# Altium PCB Charger600.PcbDoc
Units mm, origin at the board's own origin, x right, y up, seen from the top; angles counter-clockwise.
Board outline 93 x 50 mm, 4 copper layers (Top Layer, Signal Layer 1, Signal Layer 2, Bottom Layer), stack 0.778 mm thick; 86 components, 22 nets, 202 pads, 131 vias.
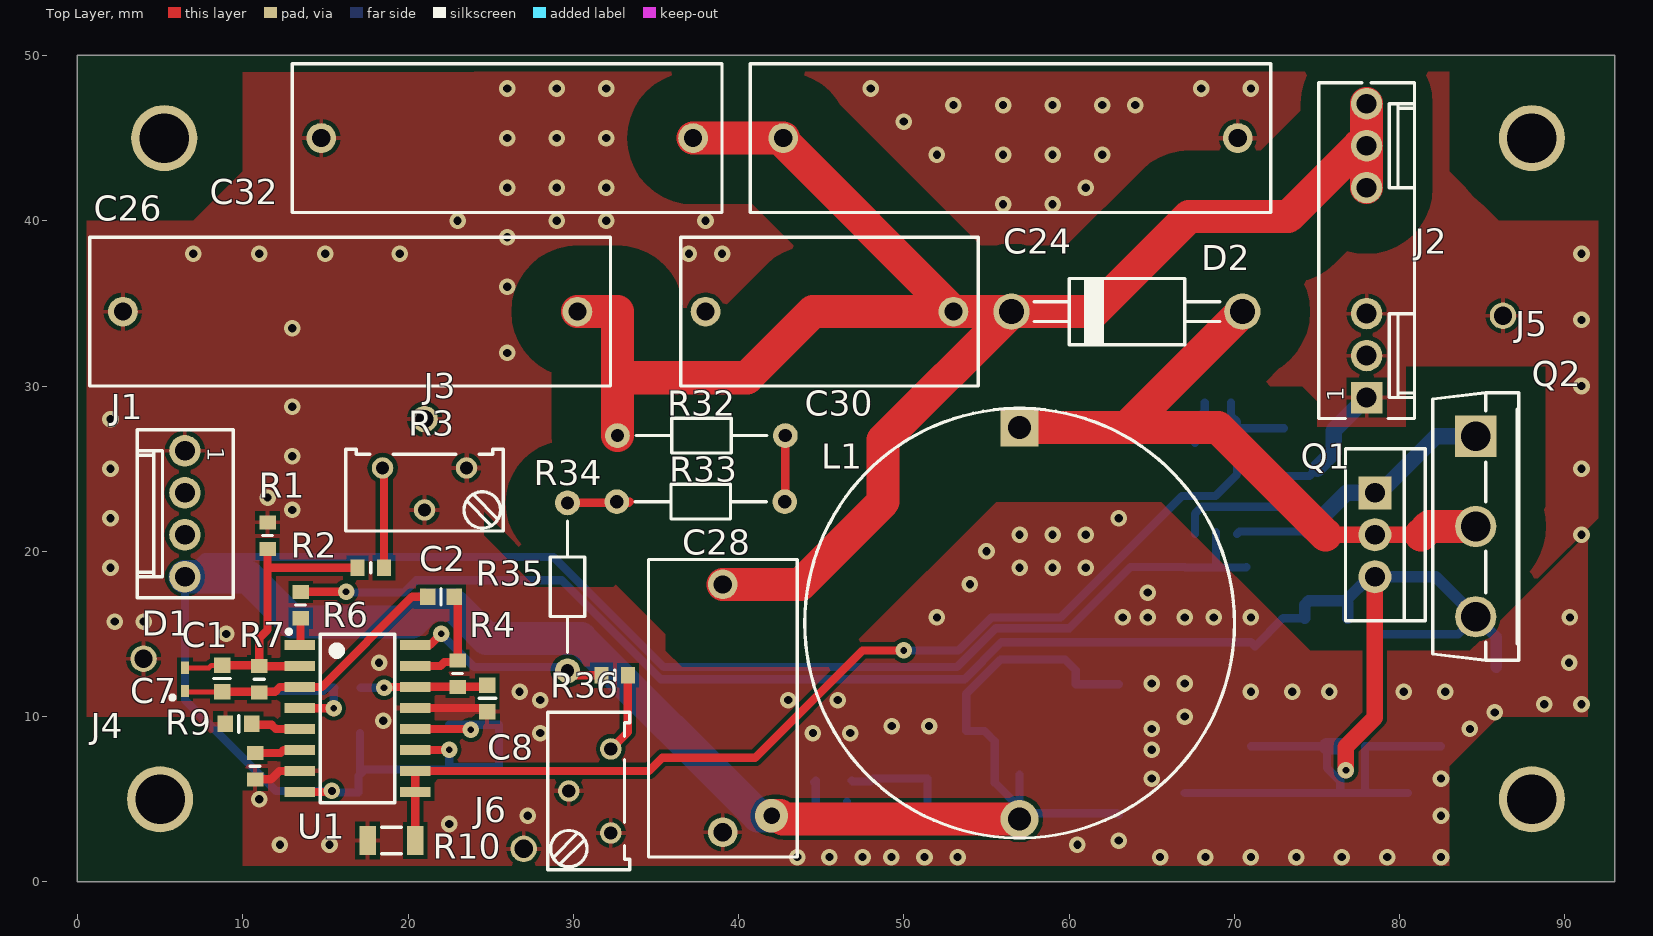
[diagram p0: Top Layer view]
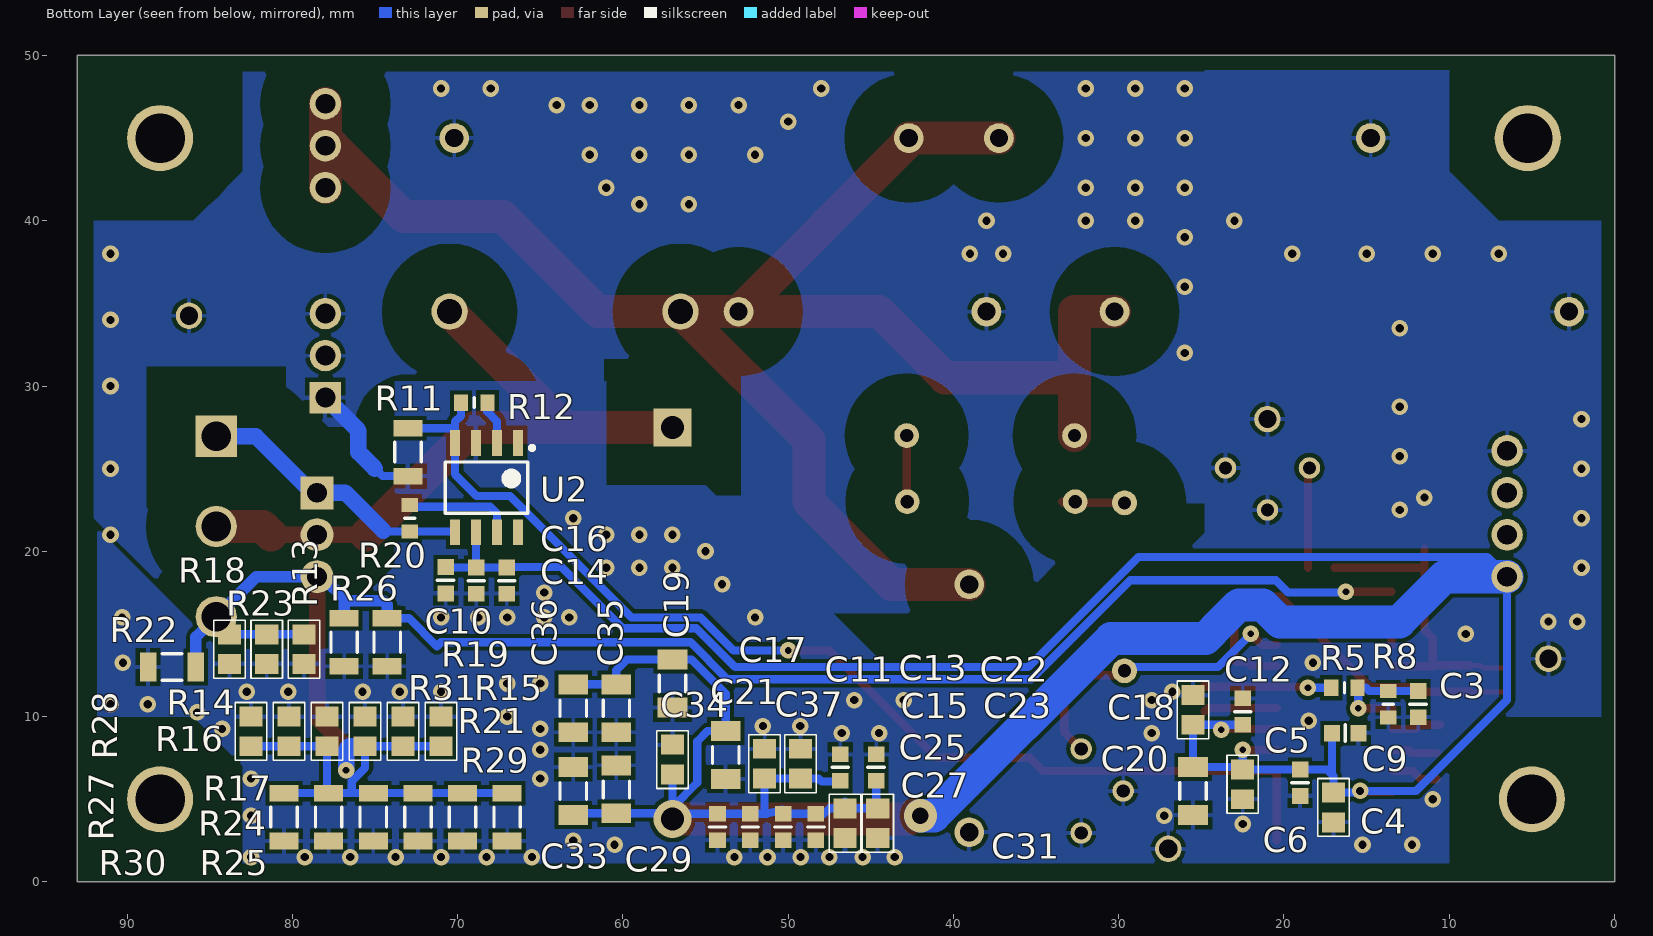
[diagram p1: Bottom Layer view, seen from below]
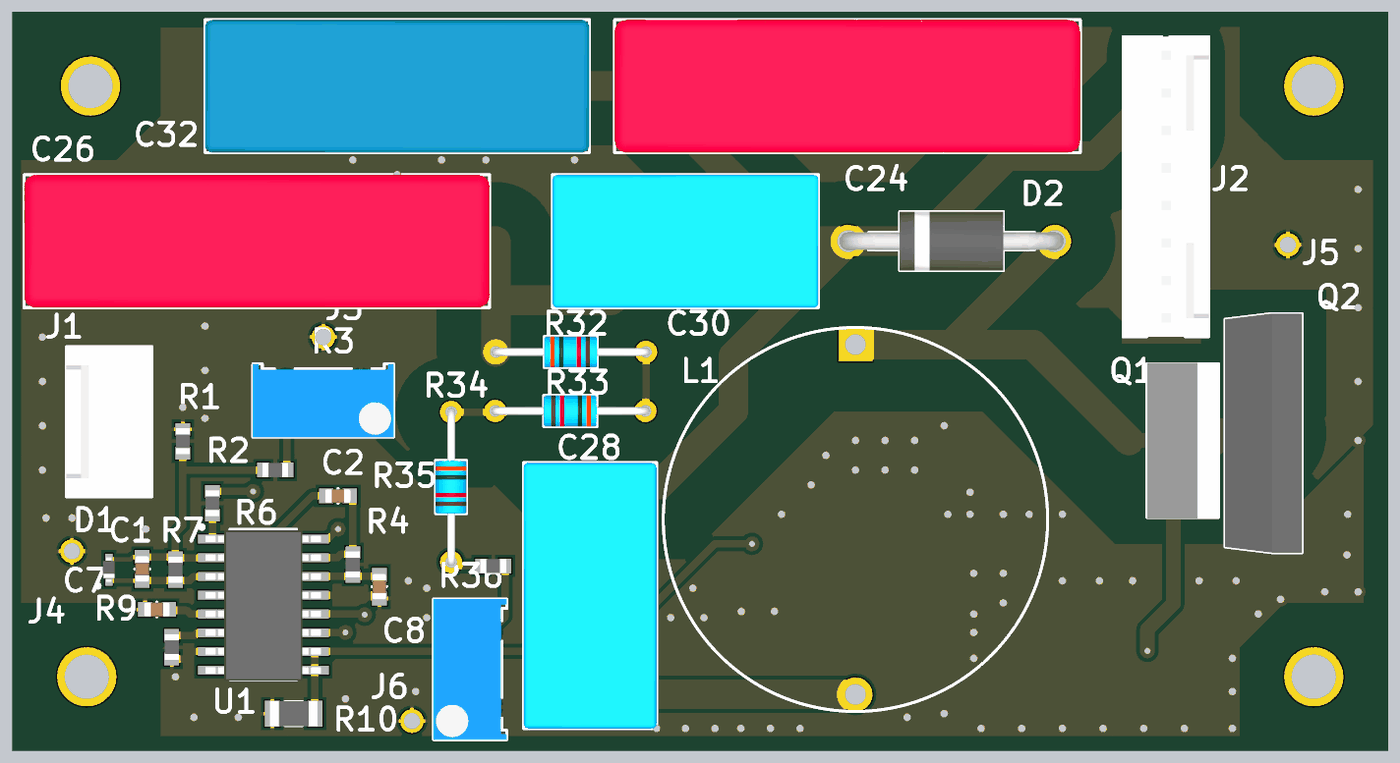
[diagram p2: 3D render of the assembled board from above, using the file's embedded part models]
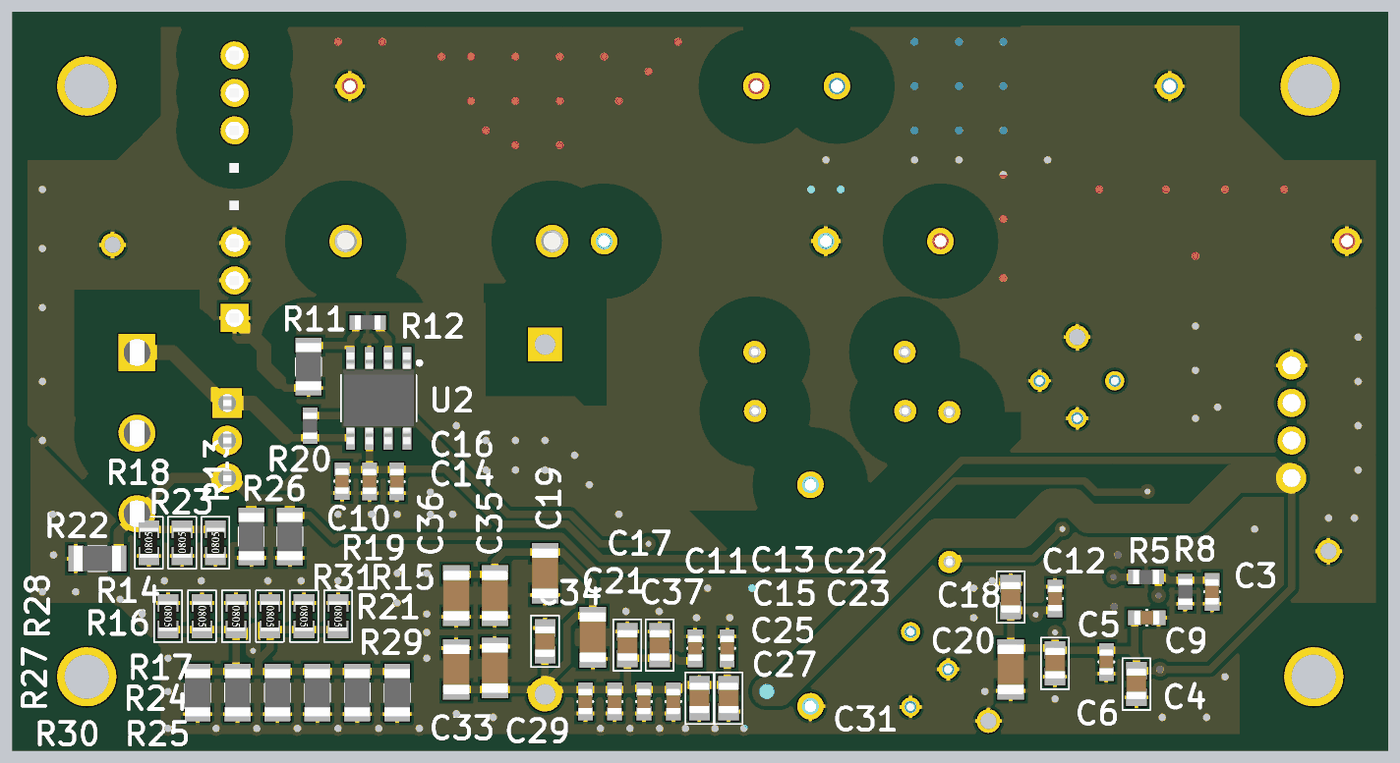
[diagram p3: 3D render of the assembled board from below, using the file's embedded part models]

## Layer stack, top to bottom
Top Solder: solder mask 0.0102, Solder Resist, Dk 3.5
Top Layer: signal copper 0.0356
Dielectric 1: core 0.254, FR-4, Dk 4.2
Signal Layer 1: signal copper 0.036
Dielectric 3: prepreg 0.127, Dk 4.2
Signal Layer 2: signal copper 0.036
Dielectric 2: core 0.254, Dk 4.2
Bottom Layer: signal copper 0.0356
Bottom Solder: solder mask 0.0102, Solder Resist, Dk 3.5

## Board outline
0,0 93,0 93,50 77.75,50 0,50

## Design rules (kind name [scope] priority, off if disabled: settings)
Clearance TopOverlay [OnLayer('Top Overlay') vs OnLayer('Top Layer')] p1: gap=0 ignorepadtopadclearanceinfootprint=TRUE except(0.254: Arc-Text Track-Text SMDPad-Text Via-Text Text-Text Text-Hole)
Clearance MultyBot [OnLayer('Bottom Layer') vs OnLayer('Multi-Layer')] p2: gap=0.254 ignorepadtopadclearanceinfootprint=TRUE except(0: Arc-Hole Track-Hole SMDPad-Hole THPad-Hole Via-Hole Fill-Hole Poly-Hole Region-Hole Text-Hole; 0.15: Arc-Arc Arc-Track Track-Track SMDPad-SMDPad; 0.2: Arc-SMDPad Arc-THPad Track-SMDPad Track-THPad)
Clearance MultyTop [OnLayer('Multi-Layer')] p3: gap=0.254 ignorepadtopadclearanceinfootprint=TRUE except(0: Arc-Hole Track-Hole SMDPad-Hole THPad-Hole Via-Hole Fill-Hole Poly-Hole Region-Hole Text-Hole; 0.15: Arc-SMDPad Arc-THPad Track-SMDPad Track-THPad SMDPad-SMDPad; 0.2: Arc-Arc Arc-Track Track-Track)
Clearance MulyMulty [OnLayer('Multi-Layer') vs OnLayer('Multi-Layer')] p4: gap=0.254 ignorepadtopadclearanceinfootprint=TRUE except(0: Arc-Hole Track-Hole SMDPad-Hole THPad-Hole Via-Hole Fill-Hole Poly-Hole Region-Hole Text-Hole; 0.2: Arc-Arc Arc-Track Arc-SMDPad Track-Track Track-SMDPad SMDPad-SMDPad)
Clearance TopTop [OnLayer('Top Layer') vs OnLayer('Top Layer')] p5: gap=0.254 ignorepadtopadclearanceinfootprint=TRUE except(0: Arc-Hole Track-Hole SMDPad-Hole THPad-Hole Via-Hole Fill-Hole Poly-Hole Region-Hole Text-Hole; 0.15: Arc-SMDPad Arc-THPad Track-SMDPad Track-THPad; 0.2: Arc-Arc Arc-Track Track-Track SMDPad-SMDPad)
Clearance BotBot [OnLayer('Bottom Layer') vs OnLayer('Bottom Layer')] p6: gap=0.254 ignorepadtopadclearanceinfootprint=TRUE except(0: Arc-Hole Track-Hole SMDPad-Hole THPad-Hole Via-Hole Fill-Hole Poly-Hole Region-Hole Text-Hole; 0.15: Arc-Arc Arc-Track Arc-THPad Track-Track Track-THPad SMDPad-SMDPad; 0.2: Arc-SMDPad Track-SMDPad)
Height [All] p1: minheight=0 maxheight=500 prefheight=12.7
HoleSize [All] p1: absolutevalues=TRUE maxlimit=10 minlimit=0.025 maxpercent=80.000 minpercent=20.000
PlaneConnect [All] p1: pad.planeconnectstyle=Relief pad.reliefexpansion=0.508 pad.reliefentries=4 pad.reliefconductorwidth=0.254 pad.reliefairgap=0.254 via.planeconnectstyle=Direct via.reliefexpansion=0.508 via.reliefentries=4 via.reliefconductorwidth=0.254 via.reliefairgap=0.254
PolygonConnect [All] p1: thpad.connectstyle=Relief thpad.reliefconductorwidth=0.254 thpad.reliefentries=4 thpad.polygonreliefangle="90 Angle" thpad.airgapwidth=0.254 smdpad.connectstyle=Relief smdpad.reliefconductorwidth=0.254 smdpad.reliefentries=4 smdpad.polygonreliefangle="90 Angle" smdpad.airgapwidth=0.254 via.connectstyle=Direct via.reliefconductorwidth=0.254 via.reliefentries=4 via.polygonreliefangle="90 Angle" via.airgapwidth=0.254
RoutingVias [All] p1: holewidth=0.4 width=1 viastyle="Through Hole" minholewidth=0.3 minwidth=0.9 maxholewidth=0.4 maxwidth=1
SolderMaskExpansion [All] p1: expansion=0.102
Width [All] p1: maxlimit=3 minlimit=0.15 preferedwidth=0.254 toplayer_prefwidth=0.25 midlayer1_minwidth=0.25 midlayer1_prefwidth=0.25 midlayer2_minwidth=0.25 midlayer2_prefwidth=0.25 bottomlayer_minwidth=0.2 minimp=50.000000 maximp=50.000000 favimp=50.000000
27 further rules are at their usual default settings.

## Components (designator, comment, footprint, x,y, rotation, side; value= is the part's Value field where it differs from the comment)
C1 "100nF" CAPC1608X87N 8.75,12.3 r90 top
C2 "100nF" CAPC1608X87N 22,17.25 r180 top
C3 "100nF" CAPC1608X87N 11.883,10.75 r90 bottom
C4 "1uF" SMD0805CAP 16.998,3.498 r90 bottom
C5 "1uF" SMD0805CAP 22.498,4.898 r90 bottom
C6 "100nF" CAPC1608X87N 19.029,6 r90 bottom
C7 "1nF" CAPC1608X87N 9.75,9.554 r0 top
C8 "100nF" CAPC1608X87N 24.8,11.1 r90 top
C9 "100nF" CAPC1608X87N 16.291,9 r0 bottom
C10 "100nF" CAPC1608X87N 70.725,18.25 r90 bottom
C11 "100nF" CAPC1608X87N 46.85,6.925 r270 bottom
C12 "100nF" CAPC1608X87N 22.5,10.3 r270 bottom
C13 "100nF" CAPC1608X87N 44.675,6.925 r270 bottom
C14 "100nF" CAPC1608X87N 68.875,18.225 r90 bottom
C15 "100nF" CAPC1608X87N 48.322,3.321 r90 bottom
C16 "100nF" CAPC1608X87N 67.025,18.225 r90 bottom
C17 "1uF" SMD0805CAP 51.427,8.152 r270 bottom
C18 "1uF" SMD0805CAP 25.502,11.402 r270 bottom
C19 "10uF" CAPC1206 57,12 r90 bottom
C20 "10uF" CAPC1206 25.5,5.5 r90 bottom
C21 "10uF" CAPC1206 53.775,7.675 r90 bottom
C22 "100nF" CAPC1608X87N 54.275,3.321 r90 bottom
C23 "100nF" CAPC1608X87N 52.291,3.321 r90 bottom
C24 "47nF" CAPR2750-900X3150X1900 56.454,45 r180 top
C25 "100nF" CAPC1608X87N 50.306,3.321 r90 bottom
C26 "47nF" CAPR2750-900X3150X1900 16.5,34.5 r0 top
C27 "1uF" SMD0805CAP 44.577,2.544 r90 bottom
C28 "10nF" CAPR1500-900X1800X1750 39.046,10.5 r90 top locked
C29 "10uF" CAPC1206 60.396,5.596 r270 bottom
C30 "10nF" CAPR1500-900X1800X1750 45.5,34.5 r0 top
C31 "1uF" SMD0805CAP 46.561,2.544 r90 bottom
C32 "22nF" CAPR2250-900X2600X1850 26,45 r0 top
C33 "10uF" CAPC1206 63,5.5 r270 bottom
C34 "1uF" SMD0805CAP 57.002,8.402 r270 bottom
C35 "10uF" CAPC1206 60.396,10.5 r90 bottom (schematic designator C38)
C36 "10uF" CAPC1206 63,10.5 r90 bottom
C37 "1uF" SMD0805CAP 49.252,8.152 r270 bottom
D1 "RB521S-30" SODFL1608X65N 6.5,12.25 r90 top
D2 "SF18" DIOAD1397W120L700D400 63.5,34.5 r0 top
J1 "WF4" WF4_2_54 6.5,22.27 r270 top
J2 "WF6HV" MOLEX_WF6HV 78,38.19 r90 top
J3 "PLS1" PLS1 21,28 r0 top
J4 "PLS1" PLS1 4,13.5 r0 top
J5 "PLS1" PLS1 86.25,34.25 r0 top
J6 "PLS1" PLS1 27,2 r0 top
L1 "68uH" muR1468362C 57,15.65 r270 top locked
Q1 "FQP6N90C" TO-220-v 78.5,21 r270 top
Q2 "2SK1358" TO-247-v 84.602,21.5 r270 top
R1 "300" RESC1608X64N 11.5,20.95 r90 top
R2 "15k" RESC1608X64N 17.75,19 r0 top
R3 "15k" TRIM_BOURNS_3296Y 21,23.77 r180 top
R4 "15k" RESC1608X64N 22.996,12.6 r270 top
R5 "43k" RESC1608X64N 16.341,11.75 r0 bottom
R6 "300" RESC1608X64N 13.5,16.75 r90 top
R7 "100k" RESC1608X64N 11,12.25 r90 top
R8 "10k" RESC1608X64N 13.687,10.75 r90 bottom
R9 "20k" RESC1608X64N 10.75,7 r90 top
R10 "510" RESC3016X65N 19,2.5 r0 top
R11 "510" RESC3016X65N 73,26 r90 bottom
R12 "0" RESC1608X64N 69,29 r180 bottom
R13 "0.1" SMD0805RES 79.29,13.073 r90 bottom
R14 "0.1" SMD0805RES 82.502,10.102 r270 bottom
R15 "0.1" SMD0805RES 73.302,10.102 r270 bottom
R16 "0.1" SMD0805RES 80.202,10.102 r270 bottom
R17 "0.1" SMD0805RES 77.902,10.102 r270 bottom
R18 "0.1" SMD0805RES 83.799,13.073 r90 bottom
R19 "0.1" SMD0805RES 75.602,10.102 r270 bottom
R20 "0" RESC1608X64N 72.896,21.996 r270 bottom
R21 "0.1" SMD0805RES 71.002,10.102 r270 bottom
R22 "0.1" RESC3016X65N 87.28,13 r180 bottom
R23 "0.1" SMD0805RES 81.544,13.073 r90 bottom
R24 "0.1" RESC3016X65N 80.5,3.921 r90 bottom
R25 "0.1" RESC3016X65N 77.8,3.921 r90 bottom
R26 "0.1" RESC3016X65N 76.863,14.5 r90 bottom
R27 "0.1" RESC3016X65N 69.7,3.921 r90 bottom
R28 "0.1" RESC3016X65N 75.1,3.921 r90 bottom
R29 "0.1" RESC3016X65N 67,3.921 r90 bottom
R30 "0.1" RESC3016X65N 72.4,3.921 r90 bottom
R31 "0.1" RESC3016X65N 74.259,14.5 r90 bottom
R32 "2M" RES1016-360X210 37.75,27 r180 top
R33 "2M" RES1016-360X210 37.714,23 r0 top
R34 "2M" RES1016-360X210 29.65,17.85 r90 top
R35 "43k" RESC1608X64N 32.5,12.5 r180 top
R36 "1k" TRIM_BOURNS_3296Y 31,5.5 r90 top
U1 "TL494CD" SOIC127P780X200-16N 16.941,9.885 r0 top
U2 "IR4427S" SOIC127P600X175-8N 68.25,23.854 r270 bottom

## Footprints (in the part's own frame and the unit in brackets; to place one, negate y for a bottom-side part, rotate by r counter-clockwise, add the part's x,y. Pads: shape width x height; smd on the part's side, far side on the other; paste and mask are expansions set on the pad)
CAPC1206 [mm]
  rect 1.2x1.8 smd: 1(-1.45,0) 2(1.45,0)
  silkscreen extent -0.5,-0.8 0.5,0.8, body extent -1.7,-0.9 1.7,0.9, height 0.7
CAPC1608X87N [mm]
  rect 0.95x1 smd: 1(-0.8,0) 2(0.8,0)
  silkscreen extent 0,-0.5 0,0.5, body extent -0.87,-0.48 0.87,0.48, height 0.87
CAPR1500-900X1800X1750 [mm] "Capacitor Radial, Pin spacing 15.0mm - Body Width 9mm X Body Length 18mm X Body Height 17.5mm"
  round 1.8 hole 1.1: 1(-7.5,0) 2(7.5,0)
  silkscreen extent -9,-4.5 9,4.5, body extent -9,-4.5 9,4.5, height 17.5
CAPR2250-900X2600X1850 [mm] "Capacitor Radial, Pin spacing 22.5mm - Body With 9mm X Body Length 26mm X Body Height 18.5mm"
  round 1.8 hole 1.1: 1(-11.25,0) 2(11.25,0)
  silkscreen extent -13,-4.5 13,4.5, body extent -13,-4.5 13,4.5, height 18.5
CAPR2750-900X3150X1900 [mm] "Capacitor Radial, Pin spacing 27.5mm - Body Width 9mm X Body Length 31.5mm X Body Height 19mm"
  round 1.8 hole 1.1: 1(-13.75,0) 2(13.75,0)
  silkscreen extent -15.75,-4.5 15.75,4.5, body extent -15.75,-4.5 15.75,4.5, height 19
DIOAD1397W120L700D400 [mm] "Diode, Axial; Lead Spacing 13.97mm, Lead Dia. 1.20mm, Body Length 7mm, Body Dia. 4mm"
  round 2.2 hole 1.5: 1(-6.985,0) 2(6.985,0)
  silkscreen extent -5.61,-2 5.61,2, body extent -7.58,-2 7.58,2, height 4
MOLEX_WF6HV [mm] "2.54mm (.100\") Pitch KK® Header, Single Row, Vertical, 8 Circuits"
  rect 1.9x1.9 hole 1.2: 1(-8.89,0)
  round 1.9 hole 1.2: 2(-6.35,0) 3(-3.81,0) 4(3.81,0) 5(6.35,0) 6(8.89,0)
  silkscreen extent -10.16,-2.9 10.16,2.9, body extent -10.16,-2.9 10.16,2.9, height 11.7
muR1468362C [mm] "Capacitor, Radial, Pin spacing 5.0mm - Body Diameter 10.0mm X Body Height 12.5mm"
  rect 2.3x2.3 hole 1.4: 1(-11.85,0)
  round 2.3 hole 1.4: 2(11.85,0)
  silkscreen extent -13,-13 13,13, body extent -12.2,-12.2 12.2,12.2, height 14
PLS1 [mm]
  round 1.6 hole 1.1: 1(0,0)
RES1016-360X210 [mm] "Resistor, Axial, Pad spacing 10.16 mm - Body Lengh 3.6mm X Body Diameter 2.1mm"
  round 1.5 hole 0.8: 1(-5.08,0) 2(5.08,0)
  silkscreen extent -3.96,-1.05 3.96,1.05, body extent -5.34,-1.05 5.34,1.05, height 2.1
RESC1608X64N [mm]
  rect 0.85x1 smd: 1(-0.8,0) 2(0.8,0)
  silkscreen extent 0,-0.3 0,0.3, body extent -0.87,-0.47 0.88,0.48, height 0.64
RESC3016X65N [mm] "Chip Resistor, EIA 1206, Metric 3016, Body 3.05x1.55mm, IPC Medium Density"
  rect 1x1.75 smd: 1(-1.45,0) 2(1.45,0)
  silkscreen extent -0.6,-0.8 0.6,0.8, body extent -1.6,-0.85 1.6,0.85, height 0.65
SMD0805CAP [mm]
  rect 1.2x1.4 smd: 1(0.102,0.002) 2(1.902,0.002)
  silkscreen extent -0.75,-0.95 2.75,0.95, body extent -0.02,-0.67 2.08,0.68, height 0.9
SMD0805RES [mm]
  rect 1.2x1.4 smd: 1(0.102,0.002) 2(1.902,0.002)
  silkscreen extent -0.75,-0.95 2.75,0.95, body extent 0,-0.63 2,0.63, height 0.51
SODFL1608X65N [mm] "Ultra Small Outline Diode Flat Lead (SOD-523), Body; 1.2mm L X 0.8mm W X 0.65mm H, IPC Medium Density"
  rect 0.75x0.5 smd: 1(-0.7,0) 2(0.7,0)
  silkscreen extent -1.22,0.63 -0.98,0.87, body extent -0.82,-0.42 0.83,0.43, height 0.65
SOIC127P600X175-8N [mm] "SOIC 8, Pitch 1.27mm - Body 4x5mm, IPC Medium Density"
  rect 1.55x0.6 smd: 1(-2.7,1.905) 2(-2.7,0.635) 3(-2.7,-0.635) 4(-2.7,-1.905) 5(2.7,-1.905) 6(2.7,-0.635) 7(2.7,0.635) 8(2.7,1.905)
  silkscreen extent -2.52,-2.5 1.55,2.88, body extent -3.1,-2.5 3.1,2.5, height 1.75
SOIC127P780X200-16N [mm] "SOIC, 1.27mm Pitch; 16 Pin, 5.30mm W X 10.20mm L X 2.00mm H body, IPC Medium Density"
  rect 1.85x0.6 smd: 1(-3.5,4.445) 2(-3.5,3.175) 3(-3.5,1.905) 4(-3.5,0.635) 5(-3.5,-0.635) 6(-3.5,-1.905) 7(-3.5,-3.175) 8(-3.5,-4.445) 9(3.5,-4.445) 10(3.5,-3.175) 11(3.5,-1.905) 12(3.5,-0.635) 13(3.5,0.635) 14(3.5,1.905) 15(3.5,3.175) 16(3.5,4.445)
  silkscreen extent -4.27,-5.1 2.25,5.37, body extent -3.9,-5.17 3.9,5.03, height 2
TO-220-v [mm] "TO-220 3-Terminal - Vertical Mount"
  rect 2x2 hole 1.2: 1(-2.54,0)
  round 2 hole 1.2: 2(0,0) 3(2.54,0)
  silkscreen extent -5.21,-1.78 5.21,3.05, body extent -5.27,-1.75 5.27,2.95, height 20.5
TO-247-v [mm] "TO-247 3-Terminal - Vertical Mount"
  rect 2.5x2.5 hole 1.8: 1(-5.46,0)
  round 2.5 hole 1.8: 2(0,0) 3(5.46,0)
  silkscreen extent -8.1,-2.6 8.1,2.6, body extent -8.1,-2.6 8.1,2.6, height 27.02
TRIM_BOURNS_3296Y [mm] "Trimming Potentiometer BOURNS 3296Y Series"
  round 1.3 hole 0.8: 1(-2.54,-1.27) 2(0,1.27) 3(2.54,-1.27)
  silkscreen extent -4.76,-2.41 4.76,2.54, body extent -4.76,-2.41 4.77,2.55, height 11.55
WF4_2_54 [mm] "2.54mm (.100\") Pitch KK® Header, Single Row, Vertical, 4 Circuits"
  round 1.9 hole 1.2: 1(-3.81,0) 2(-1.27,0) 3(1.27,0) 4(3.81,0)
  silkscreen extent -5.08,-2.88 5.08,2.92, body extent -5.08,-2.88 5.08,2.92, height 11.7

## Part data
C1 C2 C3 C6 C7 C8 C9 C10 C11 C12 C13 C14 C15 C16 C22 C23 C25: library part C0603, "Чип конденсатор 0603", DielectricType=X5R, Tolerance=20%, Voltage=50V, Device=Cap603, Pkg=SMD0603, Price=2, SMD Solders=2, Solder Option=RM, Vendor=Vishay
C4 C5 C17 C18 C27 C31 C34 C37: library part C0805, "Чип конденсатор 0805", DielectricType=X5R, Tolerance=20%, Voltage=25V, Device=Cap0805, Pkg=SMD0805, Price=2, SMD Solders=2, Solder Option=RM, Vendor=Vishay
C19 C20 C21 C29 C33 C35 C36: library part C1206, "Чип конденсатор 1206", DielectricType=X5R, Tolerance=1%, Voltage=25V, Device=Cap1206, Pkg=SMD1206, Price=2, SMD Solders=2, Solder Option=RM, Vendor=Vishay
C24 C26: library part CBB81, "HV THD capacitor", Tolerance=+-10%, Voltage=1kV, Device=CBB81, Pkg=15mm, Price=50, SMD Solders=0, Solder Option=RM, Vendor=Neon
C28 C30: library part CK45-B3AD, "HV THD capacitor", Tolerance=+-10%, Voltage=1kV, Device=CK45-E3AD, Pkg=15mm, Price=50, SMD Solders=0, Solder Option=RM, Vendor=TDK
C32: library part CT-81, "HV THD capacitor", Tolerance=+-10%, Voltage=1kV, Device=CT81, Pkg=15mm, Price=50, SMD Solders=0, Solder Option=RM
D1: "Чип Шоттки диод", Voltage=30V, Device=RB521S-30, Name to order=RB521S-30, Pkg=SOD523, Price=5, SMD Solders=2, Solder Option=RM, Vendor=CTK
D2: "HV fast diode", Voltage=800, Device=SF18, Name to order=SF18, Pkg=DO41, Price=10, SMD Solders=2, Solder Option=RM, Vendor="Shenzhen Luguang Electronic Technology"
J1: "Вилка  WF4", Device=WF4, Price=20, SMD Solders=0, Solder Option=RM, THD Solders=4, Vendor=Confly
J2: "Вилка  WF6 HV", Device=WF6HV, Price=20, SMD Solders=0, Solder Option=RM, THD Solders=6, Vendor=Confly
J3 J4 J5 J6: "Штырь PLS1", Device=PLS1, Price=1, SMD Solders=0, Solder Option=RM, THD Solders=1, Vendor=Confly
L1: library part 1468362С, "THD inductor", Tolerance=20%, Device=1468362С, Price=600, SMD Solders=0, Solder Option=RM, THD Solders=2, Vendor=muRata
Q1 Q2: "NMOS", Voltage=900V, SMD Solders=0, Solder Option=RM, THD Solders=3
  Q1: Device=FQP6N90C, Name to order=FQP6N90C, Pkg=TO220, Price=250, Vendor="On Semiconductor"
  Q2: Device=2SK1358, Name to order=2SK1358, Pkg=TO247, Price=500, Vendor=Inchange
R1 R2 R4 R5 R6 R7 R8 R9 R12 R20 R35: library part R0603, "Чип резистор 0603", Tolerance=1%, Device=Res603, Pkg=SMD0603, Price=2, Pwr=60mW, SMD Solders=2, Solder Option=RM, TC=100ppm/C, Vendor=Vishay
R3 R36: library part 3296, "Trimmer Potentiometer", Device=3296Y, Pkg=Bourns3296, Price=200, Pwr=250mW, SMD Solders=0, Solder Option=RM, TC=100ppm/C, THD Solders=3, Vendor=Bourns
R10 R11 R22 R24 R25 R26 R27 R28 R29 R30 R31: library part R1206, "Чип резистор 1206", Tolerance=1%, Device=Res1206, Pkg=SMD1206, Price=2, Pwr=250mW, SMD Solders=2, Solder Option=RM, TC=100ppm/C, Vendor=Vishay
R13 R14 R15 R16 R17 R18 R19 R21 R23: library part R0805, "Чип резистор 0805", Tolerance=1%, Device=Res0805, Pkg=SMD0805, Price=2, Pwr=125mW, SMD Solders=2, Solder Option=RM, TC=100ppm/C, Vendor=Vishay
R32 R33 R34: library part CF-1/4W, "250mW THD resistor", Tolerance=1%, Device=CF-1/4W, Pkg=RES1016-360X210, Price=2, Pwr=250mW, SMD Solders=0, Solder Option=RM, TC=100ppm/C, THD Solders=2, Vendor=CCO
U1: library part TL494, "PWM Controller", Current=8mA, thVoltage=-, Device=TL494, Name to order="TL494CD, TL494ID", Pkg=SOIC16, PkgCode=CD, Price=200, SMD Solders=16, Solder Option=RM, THD Solders=0, Vendor="Texas Instruments"
U2: library part IR4427, "Double low side non inverting MOSFET driver", Current=200uA, thVoltage=-, Device=IR4427, Name to order=IR4427, Pkg=SOIC8, PkgCode=S, Price=260, SMD Solders=8, Solder Option=RM, THD Solders=0, Vendor="International Rectifier"

## Free pads (board coordinates)
  round 4 hole 3: 0(5,5) 0(5.25,45) 0(88,5) 0(88,45)

## Via types
v1: diameter 1, hole 0.5, Top Layer to Bottom Layer, tented both sides, 122 vias
v2: diameter 1, hole 0.4, Top Layer to Bottom Layer, tented both sides, 8 vias
v3: diameter 2, hole 1, Top Layer to Bottom Layer, tented both sides, 1 vias

## Nets (pads, with @x,y where several pads share a name; then routed paths per layer and width w, separated by ;. In a path a pad name is that pad's centre, name@x,y a point inside that pad or via, vN(x,y) a via of type N, cw(c..) or ccw(c..) an arc to the next point about the centre after c; other vN are vias at no path point)
5Vref: C8.2 R4.2 R5.2 U1.14 | length 7.7
  Top Layer w0.5: v2(18.55,11.75) 18.59,11.79 U1.14 20.451,11.8 R4.2 24.7,11.8 C8.2
  Bottom Layer w0.5: R5.2 v2(18.55,11.75)
12V: C4.2 C5.2 C6.2 C9.2 C10.2 C11.2 C12.2 C13.2 C14.2 C15.2 C16.2 C17.2 C18.2 C19.2 C20.2 C21.2 C22.2 C23.2 C25.2 C27.2 C29.2 C31.2 C33.2 C34.2 C35.2 C36.2 C37.2 J1.4 L1.2 U1.8 U1.11 U1.12 U2.6 | length 227.6
  Top Layer w0.5: U1.8 15.14,5.44 15.2,5.5 v1(15.4,5.5) ; U1.11 22.48,7.98 v2(22.5,8) ; U1.12 23.85,9.25 v2(23.8,9.2)
  Top Layer w2: v3(42,4) 42.5,4 42.7,3.8 L1.2
  Bottom Layer w0.5: C9.2 17.091,6.709 17.2,6.6 ; v2(22.5,8) C5.2 ; C12.2 v2@23.6,9.5 ; v2(23.8,9.2) 23.8,9.3 v2@23.6,9.5 ; C13.2@44.579,6.029 C13.2 44.675,4.542 C27.2 C31.2 ; C31.2@46.563,4.863 C31.2 ; C11.2 46.9,6.075 47.975,6.075 48.15,6.25 C37.2 C17.2 51.425,4.271 51.275,4.121 ; C15.2@48.221,4.32 47.829,4.121 47.504,4.446 C31.2 ; C15.2 50.133,4.121 50.306,4.295 C25.2 ; C25.2@50.367,4.355 51.275,4.121 ; C34.2 L1.2@57,4.5 ; C33.2 62.904,4.146 C29.2 57.346,4.146 L1.2 ; C36.2 C35.2 60.396,12.804 59.75,13.45 C19.2 55.85,13.45 53.775,11.375 C21.2 54.875,9.125 55.5,8.5 55.5,6 L1.2@57,4.5 ; U2.6 68.885,19.035 C14.2 ; C10.2 70.7,19.025 C14.2 ; 17.2,6.6 17.4,6.8 C6.2 C5.2 ; 17.2,6.6 17,6.4 C4.2 15.5,5.4 v1(15.4,5.5) 12,5.5 6.5,11 J1.4 7.7,19.66 28.805,19.66 35.469,12.996 53.208,12.996 55.562,15.35 60.019,15.35 63.719,19.05 67,19.05 C16.2 C14.2 ; C5.2 22.65,6.95 C20.2 C18.2 v2@23.6,9.5 ; 51.275,4.121 C23.2 C22.2 56.679,4.121 L1.2 ; L1.2 L1.2@57,4.5
  Bottom Layer w2: J1.4 10.29,18.46 13.023,15.727 20.246,15.727 21.273,16.754 22.727,16.754 23.754,15.727 24.761,14.72 30.458,14.72 41.178,4 v3(42,4)
Drain: D2.2 L1.1 Q1.2 Q2.2 | length 40.3
  Top Layer w1: 75.5,21 Q1.2 81.3,21
  Top Layer w2: L1.1 63.485,27.5 ; 65.368,29.382 63.485,27.5 ; 65.46,29.475 D2.2 ; 75.5,21 69,27.5 63.485,27.5 ; 81.3,21 81.8,21.5 Q2.2
Gate: Q1.1 Q2.1 R20.2 U2.5 | length 16.9
  Bottom Layer w0.5: U2.5@70.155,21.05 70.305,21.2 R20.2@72.896,21.2 ; R20.2 74.446,21.196 74.5,21.25
  Bottom Layer w1: 74.5,21.25 76.79,23.54 Q1.1 78.792,23.54 82.212,26.96 Q2.1
GND: C3.1 C4.1 C5.1 C6.1 C7.1 C8.1 C9.1 C10.1 C11.1 C12.1 C13.1 C14.1 C15.1 C16.1 C17.1 C18.1 C19.1 C20.1 C21.1 C22.1 C23.1 C24.1 C25.1 C26.1 C27.1 C28.1 C29.1 C30.1 C31.1 C32.1 C33.1 C34.1 C35.1 C36.1 C37.1 J1.1 J2.1 J2.2 J2.3 J3.1 J4.1 J5.1 J6.1 R1.2 R3.1 R3.2 R8.1 R9.1 R10.1 R11.1 R13.1 R14.1 R15.1 R16.1 R17.1 R18.1 R19.1 R21.1 R22.1 R23.1 R24.1 R25.1 R26.1 R27.1 R28.1 R29.1 R30.1 R31.1 R36.1 R36.2 U1.7 U1.13 U2.3 | length 15.1
  Top Layer w0.5: R9.1 11.7,6.2 12.21,6.71 U1.7 ; U1.13 24.58,10.52 C8.1
  Bottom Layer w0.5: R11.1 74.55,24.55 75,25
  Bottom Layer w1: 75,25 76,26 76,27.3 J2.1
  other v1: 43.546,1.5 45.5,1.5 47.5,1.5 49.25,1.5 51.25,1.5 53.25,1.5 65.5,1.5 68.25,1.5 71,1.5 73.75,1.5 76.5,1.5 79.25,1.5 82.5,1.5 12.25,2.25 15.25,2.25 60.5,2.25 63,2.5 22.5,3.5 27.25,4 82.5,4 11,5 65,6.25 82.5,6.25 65,8 28,9 44.5,9 46.75,9 65,9.25 84.25,9.25 49.275,9.425 51.525,9.425 18.5,9.75 67,10 85.75,10.25 88.75,10.75 91,10.75 28,11 43,11 46,11 26.75,11.5 71,11.5 73.5,11.5 75.75,11.5 80.25,11.5 82.75,11.5 65,12 67,12 18.25,13.25 90.25,13.25 9,15 2.25,15.75 4,15.75 52,16 63.25,16 64.75,16 67,16 68.75,16 71,16 90.3,16 64.75,17.5 54,18 2,19 57,19 59,19 61,19 55,20 57,21 59,21 61,21 91,21 2,22 63,22 13,22.5 11.5,23.25 2,25 91,25 13,25.75 2,28 13,28.75 91,30 26,32 13,33.5 91,34 26,36 7,38 11,38 15,38 19.5,38 37,38 39,38 91,38 26,39 23,40 29,40 32,40 38,40 56,41 59,41 26,42 29,42 32,42 61,42 52,44 56,44 59,44 62,44 26,45 29,45 32,45 50,46 53,47 56,47 59,47 62,47 64,47 26,48 29,48 32,48 48,48 68,48 71,48
iFBk: Q1.3 Q2.3 R6.2 R13.2 R14.2 R15.2 R16.2 R17.2 R18.2 R19.2 R21.2 R22.2 R23.2 R24.2 R25.2 R26.2 R27.2 R28.2 R29.2 R30.2 R31.2 | length 132.6
  Top Layer w0.5: R6.2 v2(16.25,17.55)
  Top Layer w1: v2(76.75,6.75) 76.75,8.188 78.5,9.938 Q1.3
  Bottom Layer w0.5: v2(16.25,17.55) 16.3,17.5 19.75,17.5 20.5,18.25 29.296,18.25 35.296,12.25 53.664,12.25 55.914,14.5 71,14.5 71.25,14.25 72.95,15.95 R31.2 ; R29.2 R27.2 R30.2 R28.2 76.4,5.371 ; R21.2 R15.2 R19.2 75.6,6.9 76.4,6.1 76.4,5.371 ; R13.2@78.956,14.975 R13.2 R23.2 83.537,14.975 Q2.3 ; R24.2 R25.2@78.1,5.371 ; R14.2 R16.2 R17.2 77.9,5.571 R25.2@78.1,5.371 ; 76.4,5.371 R25.2 R25.2@78.1,5.371
  Bottom Layer w0.7: R31.2 74.259,16.741 74.25,16.75 74.5,17 76.722,17 ; R26.2 76.863,16.859 76.722,17 ; R22.2 85.83,14.812 Q2.3 82.182,18.46 Q1.3 78.182,18.46 76.722,17
  Bottom Layer w1: R19.2 76.55,8.2 76.75,8 v2(76.75,6.75)
NetC1_1: C1.1 C2.2 D1.1 R7.1 U1.3 | length 16.9
  Top Layer w0.3: D1.1 6.55,11.5 C1.1
  Top Layer w0.5: C1.1 11.95,11.5 12.24,11.79 U1.3 14.79,11.79 20.25,17.25 C2.2@21,17.25
NetC1_2: C1.2 D1.2 R1.1 R2.1 R7.2 U1.2 | length 19.5
  Top Layer w0.3: D1.2 7.95,12.95 8.1,13.1 C1.2
  Top Layer w0.5: C1.2 10.95,13.1 R7.2 13.431,13.05 U1.2 ; R7.2@11,13.3 11,14.75 11.5,15.25 11.5,19 ; R1.1 11.5,19 ; R2.1 11.5,19
NetC2_1: C2.1 R4.1 U1.15 | length 6.6
  Top Layer w0.5: U1.15 21.96,13.06 22.2,13.3 22.896,13.3 R4.1 23.004,13.408 23.004,17.046 C2.1
NetC3_2: C3.2 R5.1 R8.2 U1.4 | length 7.4
  Top Layer w0.5: U1.4 13.461,10.5 15.25,10.5 15.5,10.25 v2(15.5,10.5)
  Bottom Layer w0.5: C3.2 R8.2 14.85,11.55 15.05,11.75 R5.1 15.5,11.709 v2(15.5,10.5)
NetC7_2: C7.2 U1.5 | length 3
  Top Layer w0.5: C7.2@10.55,9.5 11.75,9.5 12,9.25 U1.5
NetC24_2: C24.2 C26.2 C28.2 C30.2 C32.2 D2.1 J2.4 J2.5 J2.6 R32.2 | length 112.9
  Top Layer w0.7: D2.1@56.549,35.059 D2.1@56.565,35.075
  Top Layer w2: C26.2 32.67,34.5 32.67,30.5 ; R32.2 32.67,30.5 ; C32.2 C24.2 42.704,44.796 C30.2 ; C28.2 43.75,18 48.75,23 48.75,26.735 D2.1 ; J2.4 J2.5 ; J2.6 J2.5 ; 32.67,30.5 40.5,30.5 44.5,34.5 C30.2 ; C30.2 D2.1 ; D2.1 61.5,34.5 67.25,40.25 73.25,40.25 77.54,44.54 J2.5
NetR2_2: R2.2 R3.3 | length 6.1
  Top Layer w0.5: R3.3 18.55,24.95 R2.2
NetR6_1: R6.1 U1.1 | length 1.6
  Top Layer w0.5: U1.1 13.5,14.389 R6.1
NetR9_2: R9.2 U1.6 | length 2.8
  Top Layer w0.5: R9.2 12.3,7.8 12.48,7.98 U1.6
NetR10_2: R10.2 R11.2 R12.1 U1.9 U1.10 U2.4 | length 68.7
  Top Layer w0.5: R10.2 20.441,2.509 U1.9 U1.10 34.583,6.71 35.377,7.504 41,7.504 47.496,14 v2(50,14)
  Bottom Layer w0.5: v2(50,14) 53.292,14 55.292,16 59.479,16 66.829,23.35 68.85,23.35 70.155,24.655 U2.4 70.155,27.5 ; R12.1 69.8,28.2 70.155,27.845 70.155,27.5 ; R11.2 70.205,27.45 70.155,27.5
NetR12_2: R12.2 U2.2 | length 2.7
  Bottom Layer w0.5: U2.2 67.615,27.865 68.2,28.45 R12.2
NetR20_1: R20.1 U2.7 | length 6.7
  Bottom Layer w0.5: U2.7@67.615,21.05 67.615,22.277 68.038,22.7 72.796,22.7 R20.1@72.896,22.8
NetR32_1: R32.1 R33.2 | length 4
  Top Layer w0.5: R33.2 42.83,23.036 R32.1
NetR33_1: R33.1 R34.2 | length 3.8
  Top Layer w0.5: R34.2 33.35,22.93 33.42,23
NetR35_1: R35.1 R36.3 | length 4.9
  Top Layer w0.5: R36.3 33.3,9.07 R35.1
vFBk: R34.1 R35.2 U1.16 | length 12.6
  Top Layer w0.5: U1.16 21.33,14.33 v2(22,15) ; R34.1 29.92,12.5 R35.2
  Bottom Layer w0.5: v2(22,15) 24,13 29.349,13 29.579,12.77 R34.1
pads on no net: J1.2 J1.3 U2.1 U2.8

## Polygon pours and split planes (outlines as drawn)
GND on Bottom Layer "GND_L04_P044" (solid, remove dead copper, pour order 44): 0.808,49.113 24.808,49.113 24.808,21.113 26.808,19.113 27.958,17.963 32.658,17.963 32.808,18.113 35.808,15.113 35.808,14.113 36.808,13.113 44.113,13.113 55,24 61,24 61,30.3 73.808,30.3 73.808,19.113 77.808,15.113 77.808,14.113 84.483,14.113 91.808,21.438 91.808,1.113 0.808,1.113
GND on Bottom Layer "GND_L04_P040" (solid, remove dead copper, pour order 40): 24,49 24,23 29,18 34,18 38,14 46,14 55.25,23.25 60.25,23.25 67,30 74.1,30 75.1,29 75,28.9 75,22.85 74,21.85 74,19 74.342,19 78.342,15 85,15 92,22 92,49
no net on Bottom Layer "NONET_L04_P030" (solid, remove dead copper, pour order 30): 25,49
no net on Bottom Layer "NONET_L04_P028" (solid, remove dead copper, pour order 28): 1,49
GND on Top Layer "GND_L01_P046" (solid, remove dead copper, pour order 46): 0.578,48.974 24.578,48.974 24.578,20.974 26.578,18.974 27.728,17.824 32.428,17.824 32.578,17.974 35.578,14.974 35.578,13.974 36.578,12.974 45.578,12.974 55.578,22.974 60.578,22.974 65.578,22.974 74.578,13.974 84.253,13.974 91.376,21.096 91.376,0.974 0.578,0.974
GND on Top Layer "GND_L01_P042" (solid, remove dead copper, pour order 42): 24,49 24,23 29,18 34,18 38,14 46,14 55.25,23.25 60.25,23.25 67,30 74.1,30 75.1,29 75,28.9 75,22.85 74,21.85 74,19 74.342,19 78.342,15 85,15 92,22 92,49
no net on Top Layer "NONET_L01_P036" (solid, remove dead copper, pour order 36): 35,40.5

## Other copper
Top Layer:
  pour cut-out: 86,40 83,43 83,50 93,50 93,40
  pour cut-out: 86,10 83,7 83,0 93,0 93,10
  pour cut-out: 7,10 10,7 10,0 0,0 0,10
  pour cut-out: 7,40 10,43 10,50 0,50 0,40
Bottom Layer:
  pour cut-out: 7,10 10,7 10,0 0,0 0,10
  pour cut-out: 7,10 10,7 10,0 0,0 0,10
  pour cut-out: 7,40 10,43 10,50 0,50 0,40
  pour cut-out: 86,40 83,43 83,50 93,50 93,40
  pour cut-out: 86,10 83,7 83,0 93,0 93,10

## Silkscreen, mask and mechanical layers (free items; w line width, h text height)
Mechanical 3:
  lines w0.1: -110,-40.5 -110,-41 ; -110,-40 -110,-41 ; -110,53 -110,-41
  lines w0.3: -110,53 -110,-41 -55,-41 -55,53
Mechanical 16:
  the board outline again, w0.254
Mechanical 17:
  circle w0.254: c70.485,34.5 r3.944

## Dimensions
0,5 to 93,-8 on Mechanical 16
5,5 to 88,5 on Mechanical 16
0,0 to 0,50 on Mechanical 16
5,5 to 5.25,45 on Mechanical 16

## Text inside footprints (layer, text, board x,y; h text height)
J1: Top Overlay "1" at 7.895,26.29 h1 r270; Mechanical 14 "1" at 7.895,26.29 h1 r270
J2: Top Overlay "1" at 76.605,29.08 h1 r90; Mechanical 14 "1" at 76.605,29.08 h1 r90